# Altium PCB clusterwink_mk_ii.PcbDoc
Units mil, origin at the board's own origin, x right, y up, seen from the top; angles counter-clockwise.
Board outline 3740.16 x 1181.1 mil, 2 copper layers (Top Layer, Bottom Layer); 102 components, 79 nets, 319 pads, 145 vias.
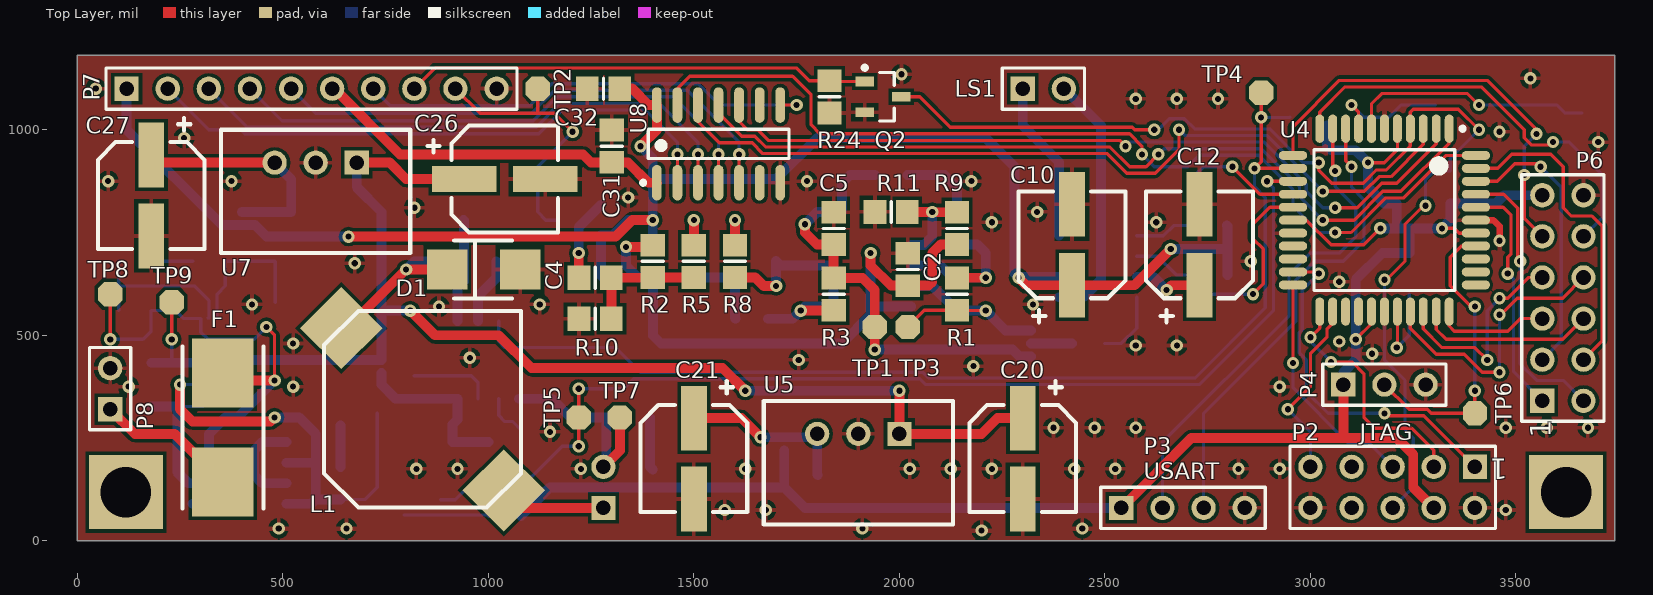
[diagram p0: Top Layer view]
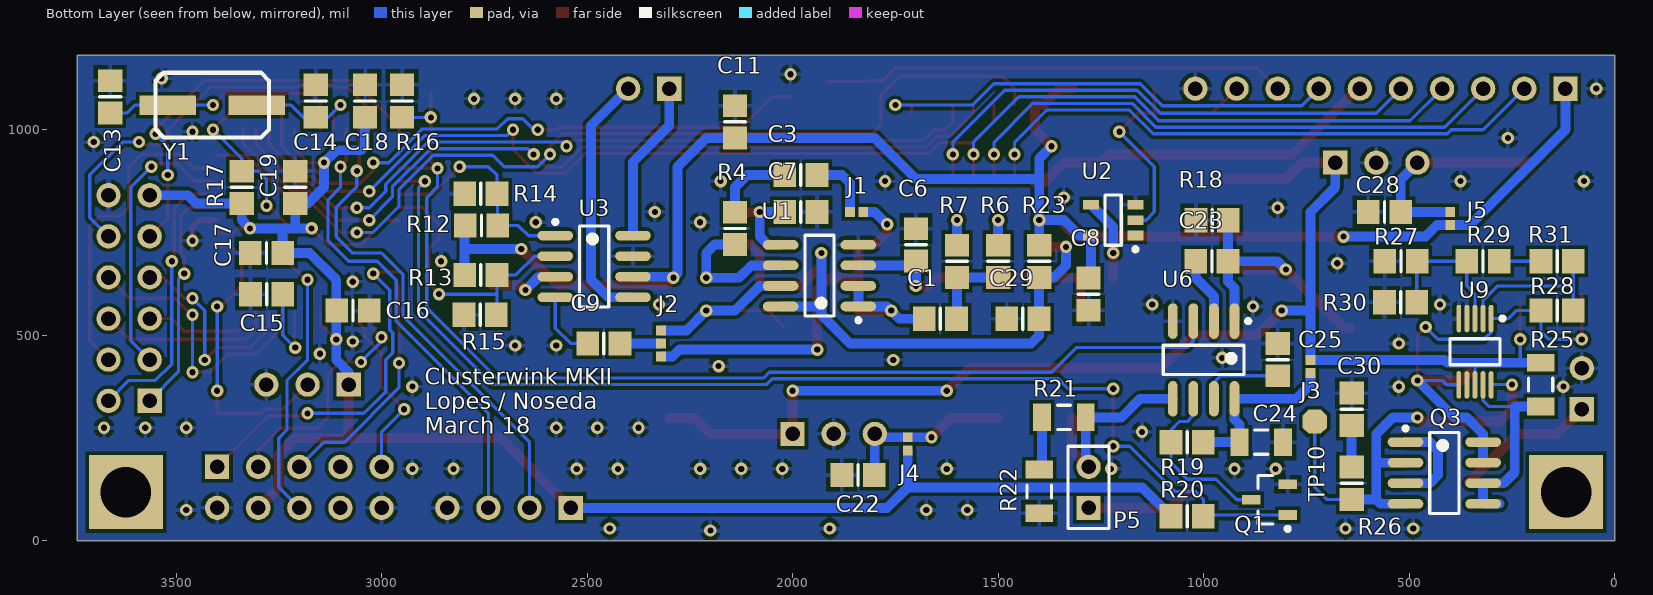
[diagram p1: Bottom Layer view, seen from below]

## Layer stack, top to bottom
Top Solder: solder mask 0.4, Solder Resist, Dk 3.5
Top Layer: signal copper 1.4
Dielectric 1: dielectric 12.6, FR-4, Dk 4.8
Bottom Layer: signal copper 1.4
Bottom Solder: solder mask 0.4, Solder Resist, Dk 3.5

## Board outline
0,0 0,1181.1 3740.16,1181.1 3740.16,0

## Design rules (kind name [scope] priority, off if disabled: settings)
Clearance "Stitching GND" [IsStitchingVia and InNet('GND') vs (IsVia and (Not IsStitchingVia)) Or IsPad] p1: gap=5 ignorepadtopadclearanceinfootprint=FALSE
Clearance [All] p2: gap=8 ignorepadtopadclearanceinfootprint=FALSE
HoleSize [All] p1: absolutevalues=TRUE maxlimit=130 minlimit=10 maxpercent=80.000 minpercent=20.000
MinimumSolderMaskSliver [All] p1: minsoldermaskwidth=4
PolygonConnect [All] p1: connectstyle=Relief reliefconductorwidth=10 reliefentries=4 polygonreliefangle="90 Angle" airgapwidth=10
RoutingCorners [All] p1: cornerstyle=45-Degree minsetback=10 maxsetback=100
RoutingVias [All] p1: holewidth=15 width=30 viastyle="Through Hole" minholewidth=15 minwidth=30 maxholewidth=30 maxwidth=60
SolderMaskExpansion [All] p1: expansion=4
UnRoutedNet [All] p1: checkbadconnections=TRUE
Width [All] p1: maxlimit=24 minlimit=8 preferedwidth=16
26 further rules are at their usual default settings.

## Classes and differential pairs
component class powersupply: C30 F1 P8 Q3 R25 R26 R27 R28 R29 R30 R31 TP8 TP9 TP10 U9
component class pi: C26 C27 C28 C29 C31 C32 J5 P7 Q2 R23 R24 U7 U8
component class led: C23 C24 C25 D1 J3 L1 P5 P6 Q1 R18 R19 R20 R21 R22 TP7 U6
component class controller: C13 C14 C15 C16 C17 C18 C19 C20 C21 C22 J4 P2 P3 P4 R16 R17 TP4 TP5 TP6 U4 U5 Y1
component class audio: C1 C2 C3 C4 C5 C6 C7 C8 C9 C10 C11 C12 J1 J2 LS1 R1 R2 R3 R4 R5 R6 R7 R8 R9 R10 R11 R12 R13 R14 R15 TP1 TP2 TP3 U1 U2 U3

## Components (designator, comment, footprint, x,y, rotation, side; value= is the part's Value field where it differs from the comment)
C1 "Cap" 6-0805_M 1640.63,540 r180 bottom value=220pF
C2 "Cap" 6-0805_M 2020,660 r270 top value=100nF
C3 "Cap" 6-0805_M 1980,890 r180 bottom value=220pF
C4 "Cap" 6-0805_M 1260,640 r180 top value=100nF
C5 "Cap" 6-0805_M 1840,760 r270 top value=220pF
C6 "Cap" 6-0805_M 1700,720 r90 bottom value=100pF
C7 "Cap" 6-0805_M 1980,800 r180 bottom value=100nF
C8 "Cap" 6-0805_M 1280,600 r270 bottom value=100nF
C9 "Cap" 6-0805_M 2459.37,480 r180 bottom value=330nF
C10 "Cap Pol2" EEEFK1H 2420,720 r180 top value=220uF
C11 "Cap" 6-0805_M 2140,1019.37 r90 bottom value=100nF
C12 "Cap Pol2" EEEFK1H 2730,720 r180 top value=220uF
C13 "Cap" 6-0805_M 3660,1080 r270 bottom value=18pF
C14 "Cap" 6-0805_M 3160,1070 r270 bottom value=18pF
C15 "Cap" 6-0805_M 3279.37,600 r180 bottom value=100nF
C16 "Cap" 6-0805_M 3069.37,560 r0 bottom value=100nF
C17 "Cap" 6-0805_M 3280,700 r180 bottom value=100nF
C18 "Cap" 6-0805_M 3040,1070 r270 bottom value=100nF
C19 "Cap" 6-0805_M 3210,860 r270 bottom value=100nF
C20 "Cap Pol2" EEEFK1H 2300,200 r0 top value=22uF
C21 "Cap Pol2" EEEFK1H 1500,200 r0 top value=22uF
C22 "Cap" 6-0805_M 1840.63,160 r180 bottom value=100nF
C23 "Cap" 6-0805_M 980,680 r180 bottom value=10nF
C24 "Cap" C1206 860,240 r0 bottom value=4.7u
C25 "Cap" 6-0805_M 820,440.63 r270 bottom value=100nF
C26 "Cap Pol2" EEEFK1H 1040,880 r90 top value=22uF
C27 "Cap Pol2" EEEFK1H 180,840 r0 top value=22uF
C28 "Cap" 6-0805_M 560,800 r180 bottom value=100nF
C29 "Cap" 6-0805_M 1440,540 r180 bottom value=100nF
C30 "Cap" 6-0805_M 640,320 r270 bottom value=10n
C31 "Cap" 6-0805_M 1300,960 r270 top value=100nF
C32 "Cap" 6-0805_M 1280,1100 r0 top value=100nF
D1 "SS24A+" DO-214AC 1077.17,660 r180 top
F1 "1.5A Fuse" OMNI_BLOK_FUSE 354.33,275.59 r90 top
J1 "Circuit Breaker" SOLDER_JUMPER_24mil 1828,800 r0 bottom
J2 "AUD Selector" SOLDER_SELECTOR_24mil 2320,448 r90 bottom
J3 "Circuit Breaker" SOLDER_JUMPER_24mil 740,440 r270 bottom
J4 "Circuit Breaker" SOLDER_JUMPER_24mil 1720,252 r270 bottom
J5 "Circuit Breaker" SOLDER_JUMPER_24mil 400,800 r270 bottom
L1 "Ind" ELLCTP 840,320 r270 top value=100uH
LS1 "Speaker" HDR1X2 2300,1100 r0 top
P2 "JTAG" HDR2X5 3400,180 r180 top
P3 "USART" HDR1X4 2540,80 r0 top
P4 "MCP9700" HDR1X3 3080,380 r0 top
P5 "PLED" HDR1X2 1280,80 r90 bottom
P6 "RGBooster" KLEMME_SEITENVERKEHRT 3614.17,590.55 r90 top
P7 "PiZero" HDR1X10 120,1100 r0 top
P8 "DC Connector" HDR1X2 80,320 r90 top
Q1 "IRLML2803" SOT-23_N 840,100 r0 bottom
Q2 "IRLML2803" SOT-23_N 1960,1080 r0 top
Q3 "FDS3992" SOIC-8 414.49,165 r180 bottom
R1 "Res2" 6-0805_M 2140,600 r270 top value=10K
R2 "Res2" 6-0805_M 1400,680 r90 top value=470k
R3 "Res2" 6-0805_M 1840,600 r90 top value=33K
R4 "Res2" 6-0805_M 2140,760 r270 bottom value=10K
R5 "Res2" 6-0805_M 1500,680 r90 top value=33k
R6 "Res2" 6-0805_M 1500,680 r270 bottom value=4k7
R7 "Res2" 6-0805_M 1600,680 r90 bottom value=33k
R8 "Res2" 6-0805_M 1600,680 r270 top value=47k
R9 "Res2" 6-0805_M 2140,760 r90 top value=10K
R10 "Res2" 6-0805_M 1260,540 r0 top value=470k
R11 "Res2" 6-0805_M 1980,800 r0 top value=10K
R12 "Res2" 6-0805_M 2757.05,766.89 r0 bottom value=10K
R13 "Res2" 6-0805_M 2758.43,646.77 r0 bottom value=10K
R14 "Res2" 6-0805_M 2758.43,844.25 r180 bottom value=10K
R15 "Res2" 6-0805_M 2760,550 r180 bottom value=10K
R16 "Res2" 6-0805_M 2950,1070 r90 bottom value=10K
R17 "Res2" 6-0805_M 3340,860 r270 bottom value=4K7
R18 "Res2" 6-0805_M 979.37,780 r180 bottom value=20K
R19 "Res2" 6-0805_M 1040,240 r0 bottom value=470K
R20 "Res2" 6-0805_M 1040,60 r0 bottom value=10K
R21 "Res2" C1206 1340,300 r180 bottom value=0.22
R22 "Res2" C1206 1400,120 r90 bottom value=0.22
R23 "Res2" 6-0805_M 1400,680 r270 bottom value=1k
R24 "Res2" 6-0805_M 1830,1080 r270 top value=10K
R25 "Res2" C1206 180,380 r90 bottom value=0R033
R26 "Res2" 6-0805_M 640,140 r270 bottom value=22k
R27 "Res2" 6-0805_M 520,680 r180 bottom value=33k
R28 "Res2" 6-0805_M 140,560 r0 bottom value=1M
R29 "Res2" 6-0805_M 320.63,680 r180 bottom value=10k
R30 "Res2" 6-0805_M 520.63,580 r180 bottom value=33k
R31 "Res2" 6-0805_M 140,680 r180 bottom value=3k3
TP1 "TestPoint" MEASUREMENT_POINT#1 1940,520 r0 top
TP2 "TestPoint" MEASUREMENT_POINT#1 1120,1100 r90 top
TP3 "TestPoint" MEASUREMENT_POINT#1 2020,520 r90 top
TP4 "TestPoint" MEASUREMENT_POINT#1 2880,1090 r180 top
TP5 "TestPoint" MEASUREMENT_POINT#1 1220,300 r0 top
TP6 "TestPoint" MEASUREMENT_POINT#2 3400,320 r0 top
TP7 "TestPoint" MEASUREMENT_POINT#1 1320,300 r90 top
TP8 "TestPoint" MEASUREMENT_POINT#1 80,600 r90 top
TP9 "TestPoint" MEASUREMENT_POINT#1 230,580 r90 top
TP10 "TestPoint" MEASUREMENT_POINT#3 730,400 r90 bottom
U1 "LM358M" M08A_N 1934.49,645 r0 bottom
U2 "74HC1G14" DBV0005A_N 1220,780 r0 bottom
U3 "TDA8551" SOIC-8 2482.83,667.4 r180 bottom
U4 "ATmega324A-AUR" 44A_N 3180,780 r270 top
U5 "TRS1" TSR1-2450 1900,260 r180 top
U6 "LM3404MAX/NOPB" M08A_N 1000,440 r270 bottom
U7 "TRS1" TSR1-2450 580,920 r180 top
U8 "TXB0104" SOIC-14 1560,965.51 r90 top
U9 "LTC4368" MSOP-10 340,460 r0 bottom
Y1 "20MHz" CRYSTAL 3411.74,1059.99 r0 bottom

## Footprints (in the part's own frame and the unit in brackets; to place one, negate y for a bottom-side part, rotate by r counter-clockwise, add the part's x,y. Pads: shape width x height; smd on the part's side, far side on the other; paste and mask are expansions set on the pad)
6-0805_M [mm] "Chip Resistor, Body 2.0x1.2mm, IPC Low Density"
  rect 1.4x1.5 smd: 1(-1,0) 2(1,0)
  silkscreen extent 0,-0.65 0,0.65, body extent -1.07,-0.7 1.07,0.7, height 0.7
44A_N [mm] "Thin QFP, 44-Leads, Body 10x10mm, Pitch 0.8mm, IPC Medium Density"
  oval 1.75x0.55 smd: 1(-5.65,4) 2(-5.65,3.2) 3(-5.65,2.4) 4(-5.65,1.6) 5(-5.65,0.8) 6(-5.65,0) 7(-5.65,-0.8) 8(-5.65,-1.6) 9(-5.65,-2.4) 10(-5.65,-3.2) 11(-5.65,-4) 23(5.65,-4) 24(5.65,-3.2) 25(5.65,-2.4) 26(5.65,-1.6) 27(5.65,-0.8) 28(5.65,0) 29(5.65,0.8) 30(5.65,1.6) 31(5.65,2.4) 32(5.65,3.2) 33(5.65,4)
  oval 0.55x1.75 smd: 12(-4,-5.65) 13(-3.2,-5.65) 14(-2.4,-5.65) 15(-1.6,-5.65) 16(-0.8,-5.65) 17(0,-5.65) 18(0.8,-5.65) 19(1.6,-5.65) 20(2.4,-5.65) 21(3.2,-5.65) 22(4,-5.65) 34(4,5.65) 35(3.2,5.65) 36(2.4,5.65) 37(1.6,5.65) 38(0.8,5.65) 39(0,5.65) 40(-0.8,5.65) 41(-1.6,5.65) 42(-2.4,5.65) 43(-3.2,5.65) 44(-4,5.65)
  silkscreen extent -5.77,-4.35 4.35,4.95, body extent -5,-5 5,5, height 1.2
C1206 [mm] "Chip Capacitor, Body 3.2x1.6mm, IPC High Density"
  rect 1.1x1.7 smd: 1(-1.35,0) 2(1.35,0)
  silkscreen extent -0.4,-0.75 0.4,0.75, body extent -1.7,-0.9 1.7,0.9, height 1.3
CRYSTAL [mm] "ABLS7M2, http://www.farnell.com/datasheets/1883657.pdf"
  rect 3.5x1.2 smd: 1(-2.75,0) 2(2.75,0)
  silkscreen extent -3.5,-2 3.5,2, body extent -3.5,-2 3.5,2, height 2
DBV0005A_N [mm] "SOT23, 5-Leads, Body 3.05x1.75mm, Pitch 0.95mm, IPC Medium Density"
  rect 1x0.6 smd: 1(-1.375,0.95) 2(-1.375,0) 3(-1.375,-0.95) 4(1.375,-0.95) 5(1.375,0.95)
  silkscreen extent -1.5,-1.55 0.5,1.92, body extent -1.42,-1.46 1.42,1.46, height 1.08
DO-214AC [mm] "Diode Package"
  rect 2.5x2.5 smd: 1(0,0) 2(4.5,0)
  silkscreen extent 0.5,-1.8 4.06,1.8, body extent 0.5,-1.25 4.05,1.25, height 2.6
EEEFK1H [mm] "Elko SMD Becher"
  rect 1.6x4 smd: 1(0,2.5) 2(0,-2.5)
  silkscreen extent -3.3,-3.3 3.3,4.79, body extent -3.15,-3.15 3.15,3.15, height 4.6
ELLCTP [mm] "Inductor"
  rect 3.6x3.6 smd rot 45: 1(-5.02,-5.02) 2(5.02,5.02)
  silkscreen extent -6.08,-6.08 6.08,6.08, body extent -6.08,-6.08 6.08,6.08, height 4.4
HDR1X2 [mm] "Connector; Header; 2 Position"
  rect 1.5x1.5 hole 0.9: 1(0,0)
  round 1.5 hole 0.9: 2(2.54,0)
  silkscreen extent -1.27,-1.27 3.81,1.27
HDR1X3 [mm] "Connector; Header; 3 Position"
  rect 1.5x1.5 hole 0.9: 1(0,0)
  round 1.5 hole 0.9: 2(2.54,0) 3(5.08,0)
  silkscreen extent -1.27,-1.27 6.35,1.27
HDR1X4 [mm] "Connector; Header; 4 Position"
  rect 1.5x1.5 hole 0.9: 1(0,0)
  round 1.5 hole 0.9: 2(2.54,0) 3(5.08,0) 4(7.62,0)
  silkscreen extent -1.27,-1.27 8.89,1.27
HDR1X10 [mm] "Connector; Header; 10 Position"
  rect 1.5x1.5 hole 0.9: 1(0,0)
  round 1.5 hole 0.9: 2(2.54,0) 3(5.08,0) 4(7.62,0) 5(10.16,0) 6(12.7,0) 7(15.24,0) 8(17.78,0) 9(20.32,0) 10(22.86,0)
  silkscreen extent -1.27,-1.27 24.13,1.27
HDR2X5 [mm] "Connector; Header; 5x2 Position"
  rect 1.5x1.5 hole 0.9: 1(0,0)
  round 1.5 hole 0.9: 2(0,2.54) 3(2.54,0) 4(2.54,2.54) 5(5.08,0) 6(5.08,2.54) 7(7.62,0) 8(7.62,2.54) 9(10.16,0) 10(10.16,2.54)
  silkscreen extent -1.27,-1.27 11.43,3.81
KLEMME_SEITENVERKEHRT [mm] "5x2 Klemme (seitenverkehrt)"
  rect 1.5x1.5 hole 0.9: 1(-6.35,1.27)
  round 1.5 hole 0.9: 2(-6.35,-1.27) 3(-3.81,1.27) 4(-3.81,-1.27) 5(-1.27,1.27) 6(-1.27,-1.27) 7(1.27,1.27) 8(1.27,-1.27) 9(3.81,1.27) 10(3.81,-1.27) 11(6.35,1.27) 12(6.35,-1.27)
  silkscreen extent -7.62,-2.54 7.62,2.54
M08A_N [mm] "SOIC, 8-Leads, Body 4.9x3.9mm, Pitch 1.27mm, IPC Medium Density"
  oval 2.2x0.6 smd: 1(-2.4,1.905) 2(-2.4,0.635) 3(-2.4,-0.635) 4(-2.4,-1.905) 5(2.4,-1.905) 6(2.4,-0.635) 7(2.4,0.635) 8(2.4,1.905)
  silkscreen extent -2.52,-2.5 0.9,2.88, body extent -2,-2.5 2,2.5, height 1.75
MEASUREMENT_POINT#1 [mm] "SMD measurement point"
  oct 1.5x1.5 smd: 1(0,0)
MEASUREMENT_POINT#2 [mm] "SMD measurement point"
  oct 1.5x1.5 smd: 1(0,-0.254)
MEASUREMENT_POINT#3 [mm] "SMD measurement point"
  oct 1.5x1.5 smd: 1(-2.794,0)
MSOP-10 [mm] "Mini Small-Outline Package 10pin"
  oval 0.3x1.7 smd: 1(-1,-2.05) 2(-0.5,-2.05) 3(0,-2.05) 4(0.5,-2.05) 5(1,-2.05) 6(1,2.05) 7(0.5,2.05) 8(0,2.05) 9(-0.5,2.05) 10(-1,2.05)
  silkscreen extent -1.82,-2.17 1.55,0.8, body extent -1.55,-1.55 1.55,1.55, height 1.09
OMNI_BLOK_FUSE [mm]
  rect 4.25x3.8 smd: 1(-3.375,0) 2(3.375,0)
  silkscreen extent -5,-2.5 5,2.5, body extent -5,-2.5 5,2.5, height 4
SOIC-8 [mm] "Small Outline Integrated Circuit 8pin Package"
  oval 2.2x0.6 smd: 1(-2.4,1.905) 2(-2.4,0.635) 3(-2.4,-0.635) 4(-2.4,-1.905) 5(2.4,-1.905) 6(2.4,-0.635) 7(2.4,0.635) 8(2.4,1.905)
  silkscreen extent -2.53,-2.5 0.9,2.88, body extent -2,-2.5 2,2.5, height 1.75
SOIC-14 [mm] "Small Outline Integrated Circuit 14pin Package"
  oval 2.2x0.6 smd: 1(-2.4,3.81) 2(-2.4,2.54) 3(-2.4,1.27) 4(-2.4,0) 5(-2.4,-1.27) 6(-2.4,-2.54) 7(-2.4,-3.81) 8(2.4,-3.81) 9(2.4,-2.54) 10(2.4,-1.27) 11(2.4,0) 12(2.4,1.27) 13(2.4,2.54) 14(2.4,3.81)
  silkscreen extent -2.52,-4.35 0.9,4.78, body extent -2,-4.37 2,4.37, height 1.75
SOLDER_JUMPER_24mil [mil] "Solder Jumber for 24mil traces, 8mil gap"
  rect 24x24 smd: 1(0,0) 2(32,0)
SOLDER_SELECTOR_24mil [mil] "Solder Selector for 24mil traces, 8mil gap"
  rect 24x24 smd: 1(0,0) 2(32,0) 3(64,0)
SOT-23_N [mm] "SOT23, 3-Leads, Body 2.9x1.3mm, Pitch 0.95mm, Lead Span 2.5mm, IPC Medium Density"
  rect 1.15x0.6 smd: 1(-1.125,0.95) 2(-1.125,-0.95) 3(1.125,0)
  silkscreen extent -1.25,-1.5 0.7,1.92, body extent -0.7,-1.5 0.7,1.5, height 1.1
TSR1-2450 [mm] "TSR1-2450 Footprint (Drop in for TO220)"
  rect 1.5x1.5 hole 0.9: 1(-2.54,0)
  round 1.5 hole 0.9: 2(0,0) 3(2.54,0)
  silkscreen extent -5.84,-2.03 5.84,5.59, body extent -5.84,-2.03 5.84,5.59, height 10.2

## Part data
C1 C2 C3 C4 C5 C6 C7 C8 C9 C11 C13 C14 C15 C16 C17 C18 C19 C22 C23 C24 C25 C28 C29 C30 C31 C32: "Capacitor", LatestRevisionDate=17-Jul-2002, LatestRevisionNote="Re-released for DXP Platform.", PackageDescription="Radial Cap, Thru-Hole; 2 Leads; 0.3 in Pin Spacing", PackageReference=RAD-0.3, Published=8-Jun-2000, Publisher="Altium Limited"
C10 C12 C20 C21 C26 C27: "Polarized Capacitor (Axial)", LatestRevisionDate=17-Jul-2002, LatestRevisionNote="Re-released for DXP Platform.", PackageDescription="Polarized Capacitor; 2 Leads", PackageReference=POLAR0.8, Published=8-Jun-2000, Publisher="Altium Limited"
D1: library part Schottky
F1: library part "Fuse 1", "Fuse", LatestRevisionDate=17-Jul-2002, LatestRevisionNote="Re-released for DXP Platform.", PackageDescription="Thru-Hole; 2 Leads", PackageReference=PIN-W2/E2.8, Published=8-Jun-2000, Publisher="Altium Limited"
J2 P4: library part "Header 3", "Header, 3-Pin", LatestRevisionDate=17-Jul-2002, LatestRevisionNote="Re-released for DXP Platform.", Publisher="Altium Limited"
L1: library part Inductor
LS1: "Loudspeaker", LatestRevisionDate=17-Jul-2002, LatestRevisionNote="Re-released for DXP Platform.", PackageReference=PIN2, Published=24-Mar-1999, Publisher="Altium Limited"
P2: library part "Header 5X2", "Header, 5-Pin, Dual row", LatestRevisionDate=17-Jul-2002, LatestRevisionNote="Re-released for DXP Platform.", Publisher="Altium Limited"
P3: library part "Header 4", "Header, 4-Pin", LatestRevisionDate=17-Jul-2002, LatestRevisionNote="Re-released for DXP Platform.", Publisher="Altium Limited"
P5 P8: library part "Header 2", "Header, 2-Pin", LatestRevisionDate=17-Jul-2002, LatestRevisionNote="Re-released for DXP Platform.", Publisher="Altium Limited"
P6: library part "Header 6X2", "Header, 6-Pin, Dual row", LatestRevisionDate=17-Jul-2002, LatestRevisionNote="Re-released for DXP Platform.", Publisher="Altium Limited"
P7: library part "Header 10", "Header, 10-Pin", LatestRevisionDate=17-Jul-2002, LatestRevisionNote="Re-released for DXP Platform.", Publisher="Altium Limited"
Q1 Q2: library part MOSFET-N, "N-Channel MOSFET", LatestRevisionDate=17-Jul-2002, LatestRevisionNote="Re-released for DXP Platform.", PackageDescription="TO, Flat Index; 3 In-Line, Axial Leads; Body Dia. 4.6mm; Lead Dia. 0.5 mm (max)", PackageReference=E3, PackageVersion=1995/1996, Published=8-Jun-2000, Publisher="Altium Limited"
Q3: "FDS3992 Dual N-Channel MOSFET"
R1 R2 R3 R4 R5 R6 R7 R8 R9 R10 R11 R12 R13 R14 R15 R16 R17 R18 R19 R20 R21 R22 R23 R24 R25 R26 R27 R28 R29 R30 R31: "Resistor", LatestRevisionDate=17-Jul-2002, LatestRevisionNote="Re-released for DXP Platform.", PackageDescription="Axial Device, Thru-Hole; 2 Leads; 0.4 in Pin Spacing", PackageReference=AXIAL-0.4, Published=8-Jun-2000, Publisher="Altium Limited"
TP1 TP2 TP3 TP4 TP5 TP6 TP7 TP8 TP9 TP10: "Testpoint"
U1: "Low Power Dual Operational Amplifier, 8-pin Narrow SOIC", Manufacturer="National Semiconductor", PackageTopMarking=NSZXTT*LM*358M, PowerWise=N, Code_IPC=SOIC127P600-8, Code_JEDEC=MS-012-AA, ComponentLink1Description="Manufacturer URL", ComponentLink1URL=http://www.national.com/, ComponentLink2Description="LM358 Datasheet", ComponentLink2URL=http://www.national.com/ds/LM/LM358.pdf, ComponentLink3Description="LM358 Web Page", ComponentLink3URL=http://www.national.com/pf/LM/LM358.html, ComponentLink4Description="M08A Package Page", ComponentLink4URL=http://www.national.com/packaging/folders/m08a.html, CompType=Amplifiers, DatasheetVersion=Oct-2005, High-Reliability=Y, PackageDescription="SOIC Narrow, 4.9 x 3.9 x 1.45mm, 8 Lead, 1.27mm Pitch", PackageReference=M08A, PackageVersion="revM, May-2009", PartNumber=LM358M, PinCount=8, RoHS=N
U2: library part SN74AHC1G14DBVT, "Single Schmitt-Trigger Inverter Gate, DBV0005A, SMALL T&R", F @ Nom Voltage(Max)(Mhz)=75, Generic Part Number=SN74AHC1G14, ICC @ Nom Voltage(Max)(mA)=0.01, Manufacturer="Texas Instruments", Operating Temperature Range(C)="-40 to 125", Rating=Catalog, Supplier Part Number 1=595-SN74AHC1G14DBVT, tpd @ Nom Voltage(Max)(ns)=16.3,10.6, Voltage(Nom)(V)=3.3,5, 3-State Output=No, Bits(#)=1, ComponentLink1Description="Manufacturer URL", ComponentLink1URL=http://www.ti.com/, ComponentLink2Description=Datasheet, ComponentLink2URL=http://www.ti.com/lit/ds/symlink/sn74ahc1g14.pdf, DatasheetVersion=SCLS321P, Input Type=CMOS, Logic=Inverting, Output Drive (IOL/IOH)(Max)(mA)=50/-50, Output Type=CMOS, PackageReference=DBV0005A, PartNumber=SN74AHC1G14DBVT, Schmitt Trigger=Yes, Sub-Family="Inverting Buffer/Driver", Supplier 1=Mouser, Supplier 2=Digi-Key, Supplier 3=Digi-Key, Supplier 4=Digi-Key, Supplier Part Number 2=296-26401-2-ND, Supplier Part Number 3=296-26401-1-ND, Supplier Part Number 4=296-26401-6-ND, Technology Family=AHC, VCC(Max)(V)=5.5, VCC(Min)(V)=2
U3: "TDA8551 1W Audio Amplifier"
U4: "8-bit AVR Microcontroller, 32KB Flash, 1KB EEPROM, 2KB SRAM, 44-pin TQFP, Industrial Grade (-40°C to 85°C), Reel", Code_JEDEC=MS-026-ACB, ComponentLink1Description="Manufacturer URL", ComponentLink1URL=http://www.atmel.com/, ComponentLink2Description="ATmega164A/164PA/324A/324PA/644A/644PA/1284/1284P Datasheet", ComponentLink2URL=http://www.atmel.com/dyn/resources/prod_documents/doc8272.pdf, ComponentLink3Description="ATmega164A/164PA/324A/324PA/644A/644PA/1284/1284P Summary", ComponentLink3URL=http://www.atmel.com/dyn/resources/prod_documents/8272S.pdf, DatasheetVersion="revC, Jun-2011", PackageDescription="44-Pin Plastic Thin Profile Quad Flat Pack, 10 x 10 x 1.0 mm Body, 0.8 mm Pitch (TQFP)", PackageReference=44A, PackageVersion="revC, Oct-2010"
U5 U7: library part TSR1-2450, "TSR1-2450 DC/DC Step-Down Converter"
U6: "1.0A Constant Current Buck Regulator for High Power LED Drivers, 8-pin Narrow SOIC, Pb-Free", Manufacturer="National Semiconductor", PackageTopMarking=NSZXTT*L3404*MA, PowerWise=Y, Code_IPC=SOIC127P600-8, Code_JEDEC=MS-012-AA, ComponentLink1Description="Manufacturer URL", ComponentLink1URL=http://www.national.com/, ComponentLink2Description="LM3404 Datasheet", ComponentLink2URL=http://www.national.com/ds/LM/LM3404.pdf, ComponentLink3Description="LM3404 Web Page", ComponentLink3URL=http://www.national.com/pf/LM/LM3404.html, ComponentLink4Description="M08A Package Page", ComponentLink4URL=http://www.national.com/packaging/folders/m08a.html, CompType=MiscPower, DatasheetVersion=Jun-2007, High-Reliability=Y, PackageDescription="SOIC Narrow, 4.9 x 3.9 x 1.45mm, 8 Lead, 1.27mm Pitch", PackageReference=M08A, PackageVersion="revM, May-2009", PartNumber=LM3404MAX/NOPB, PinCount=8, RoHS=Y
U8: "TXB0104 4bit Bidirectional Voltage-Level Translator"
U9: "LTC4368 UV/OV/Reverse Protection IC"
Y1: library part XTAL, "Crystal Oscillator", LatestRevisionDate=17-Jul-2002, LatestRevisionNote="Re-released for DXP Platform.", PackageDescription="Crystal, Thru-Hole; 2 Leads; Body 3.1 x 8.2 mm (Dia.xH)", PackageReference=R38, Published=8-Jun-2000, Publisher="Altium Limited"
J1 J3 J4 J5: LatestRevisionDate=17-Jul-2002, LatestRevisionNote="Re-released for DXP Platform.", PackageDescription="Switch; 2 Leads", PackageReference=SPST-2, Published=24-Mar-1999, Publisher="Altium Limited"

## Free pads (board coordinates)
  rect 180x180 hole 122.05: 1(3622.05,118.11) 2(118.11,118.11)

## Via types
v1: diameter 30, hole 15, Top Layer to Bottom Layer, 145 vias

## Nets (pads, with @x,y where several pads share a name; then routed paths per layer and width w, separated by ;. In a path a pad name is that pad's centre, name@x,y a point inside that pad or via, vN(x,y) a via of type N, cw(c..) or ccw(c..) an arc to the next point about the centre after c; other vN are vias at no path point)
+3V3_PI: C31.2 P7.6 U8.1 | length 884.8
  Top Layer w24: P7.6 625.25,1100 785.25,940 1230,940 1249.37,920.63 C31.2 1339.37,920.63 1388.98,871.02 U8.1
+5V: C16.2 C17.2 C18.2 C19.2 J4.2 P2.4 P3.1 P4.1 P6.11 R17.2 R20.2 U4.5 U4.17 U4.27 U4.38 | length 4548.8
  Top Layer w8: U4.17 2990,780 3050,720 3130,720 v1(3170,760) ; v1(3110,490) 3148.5,528.5 U4.27 ; v1(3140,920) 3180,920 3211.5,951.5 U4.5 ; v1(3320,760) 3350,760 3361.5,748.5 U4.38
  Top Layer w24: P3.1 2710,250 3080,250 ; P4.1 3080,250 ; P2.4 3250,130 3250,210 3210,250 3080,250
  Bottom Layer w24: R20.2 1149.37,130 1720,130 ; J4.2 1720,130 ; P3.1 1770,80 1720,130 ; C18.2@3040,1010.63 3040,960 3050,950 3110,950 v1(3140,920) 3140,860 3179.37,820.63 C19.2 3210,760 ; P4.1 3080,410 3110,440 v1(3110,490) 3110,635 3175,700 C17.2 3240.63,759.37 3240,760 ; v1(3170,760) 3210,760 ; P6.11 3470.55,840.55 3450.63,820.63 R17.2 3340,780 v1(3320,760) 3240,760 ; 3210,760 3240,760
+5V_AUD: C2.2 C29.2 R2.2 R9.1 R23.2 U1.8 | length 1488.7
  Top Layer w24: v1(1335,715) 1395.63,715 R2.2 ; v1(1930,700) 1930,670 1979.37,620.63 C2.2 2070.63,620.63 2080,630 2080,700 2100.63,720.63 R9.1
  Bottom Layer w24: v1(1335,715) 1335,670 1364.37,640.63 R23.2 1400.63,640 C29.2 1400.63,499.37 1420,480 1860,480 1930,550 1930,570 ; v1(1930,700) 1930,570 ; U1.8 1930,570
+5V_PI: C8.1 C10.1 C11.1 C32.2 J5.2 P7.1 R12.2 R13.2 R23.1 U2.5 U3.6 U8.14 | length 4224.7
  Top Layer w24: v1(660,740) 1310,740 1350,780 v1(1400,780) ; C32.2 1350,1100 1390,1060 U8.14 1410,1000 v1(1370,960) ; v1(2290,640) 2308.43,621.57 C10.1 2571.57,621.57 v1(2660,710)
  Bottom Layer w24: P7.1 120,1000 352,768 J5.2 432,768 460,740 v1(660,740) ; C8.1 1274.13,645.24 U2.5 1302.6,742.6 1340,780 v1(1400,780) ; v1(1370,960) 1400,930 1400,880 ; R23.1 v1(1400,780) ; U3.6 2292.4,642.4 v1(2290,640) 2280,650 2280,910 2210,980 C11.1 1800,980 1700,880 1400,880 ; v1(2660,710) 2797.8,710 ; R12.2 2797.8,765.51 2797.8,710 ; R13.2 2797.8,710 ; v1(1400,780) 1400,880
+24V: C20.1 C26.1 J3.1 R25.2 TP9.1 U5.1 U7.1 U9.8 | length 3308.2
  Top Layer w8: v1(230,490) TP9.1
  Top Layer w24: U7.1 760,920 800,880 C26.1 ; v1(810,560) 870,500 1025,500 1105,420 1570,420 v1(1625,365) ; v1(2000,365) U5.1 2200,260 2238.43,298.43 C20.1
  Bottom Layer w8: 230,433.15 v1(230,490) ; U9.8 340,433.15
  Bottom Layer w24: R25.2 230,433.15 340,433.15 407.09,433.15 413.94,440 J3.1 740,560 ; U7.1 680,860 740,800 740,560 ; v1(810,560) 740,560 ; v1(1625,365) v1(2000,365)
AUD_INT: J2.3 R1.2 TP3.1 U1.7 | length 542.8
  Top Layer w8: TP3.1 2060.63,560.63 R1.2 2140.63,560 v1(2210,560)
  Bottom Layer w24: U1.7 2080,620 2140,560 v1(2210,560) 2258,512 J2.3
AUD_PWM: P7.9 TP2.1 U2.2 | length 672.9
  Top Layer w8: P7.9 980,1040 1120,1040 ; TP2.1 1120,1040 ; v1(1205,995) 1160,1040 1120,1040
  Bottom Layer w8: U2.2 1140,780 1120,800 1120,910 v1(1205,995)
AUD_RC: C5.2 J1.1 J2.1 R3.2 TP1.1 | length 898.1
  Top Layer w24: v1(1770,770) 1770,750 1799.37,720.63 C5.2 R3.2 1910.63,639.37 1940,610 TP1.1 v1(1940,465)
  Bottom Layer w24: v1(1770,770) 1800,800 J1.1 ; v1(1940,465) 2275,465 2292,448 J2.1
B\/D: P6.10 U4.11 | length 1027.6
  Top Layer w8: U4.11 3022.52,1042.52 3084,1104 3416,1104 3520,1000 3520,980 3537,963 3583,963 v1(3590,970)
  Bottom Layer w8: v1(3590,970) 3630,970 3710,890 3710,786.38 P6.10
DATA0: P6.1 U4.40 | length 575.7
  Top Layer w8: U4.40@3410,811.5 3468.5,811.5 3488,792 3488,698 3480,690 v1(3480,650)
  Bottom Layer w8: v1(3480,650) 3494,636 3494,410.72 P6.1
DATA1: P6.2 U4.41 | length 688.1
  Top Layer w8: U4.41 3469.64,842.99 3504,808.63 3504,686 v1(3510,680)
  Bottom Layer w8: v1(3510,680) 3510,430 3550,390 3614.72,390 P6.2
DATA2: P6.3 U4.42 | length 687.2
  Top Layer w8: U4.42 3454.49,874.49 3497,917 3553,917 v1(3560,910)
  Bottom Layer w8: v1(3560,910) 3610,860 3610,486.38 P6.3
DATA3: P6.4 U4.43 | length 796.1
  Top Layer w8: U4.43 3455.98,905.98 3490,940 3585,940 3615,910 3615,810 3635,790 3685,790 3710,765 3710,486.38 P6.4
DATA4: P6.5 U4.33 | length 279.6
  Top Layer w8: U4.33 3337.48,522.52 3350,510 3480,510 3510.55,540.55 P6.5
DATA5: P6.6 U4.32 | length 432.6
  Top Layer w8: U4.32 3305.98,514.02 3330,490 3613.62,490 P6.6
DATA6: P6.7 U4.31 | length 516.4
  Top Layer w8: U4.31 3274.49,515.51 3320,470 3400,470 v1(3430,440) ; v1(3460,590) 3480,590 3530.55,640.55 P6.7
  Bottom Layer w8: v1(3430,440) 3430,560 v1(3460,590)
DATA7: P6.8 U4.30 | length 683.6
  Top Layer w8: U4.30 3242.99,517.01 3306,454 3374.18,454 3418.18,410 v1(3460,410) ; v1(3460,550) 3462.63,550 3502.63,590 3613.62,590 P6.8
  Bottom Layer w8: v1(3460,410) v1(3460,550)
DRIVER: Q1.1 R20.1 TP5.1 U4.14 | length 2823.9
  Top Layer w8: v1(1220,230) TP5.1 v1(1220,370) ; v1(2894.49,874.49) U4.14
  Bottom Layer w8: Q1.1 998.03,62.6 R20.1 1000.63,100.63 1020,120 1070,120 1180,230 v1(1220,230) ; v1(1220,370) 1330,370 1354,394 2050,394 2064,380 2730,380 2910,560 2910,858.98 v1(2894.49,874.49)
GND: C2.1 C5.1 C6.2 C7.2 C8.2 C10.2 C11.2 C12.2 C13.1 C14.1 C15.1 C16.1 C17.1 C18.1 C19.1 C20.2 C21.2 C22.1 C24.1 C25.1 C26.2 C27.2 C28.1 C29.1 C30.1 C31.1 C32.1 D1.1 P2.2 P2.10 P3.4 P4.3 P6.12 P7.10 P8.2 Q1.2 Q2.2 R10.1 R11.1 R14.1 R15.1 R16.2 R18.1 R22.1 R24.2 R27.1 R30.1 U1.4 U2.3 U3.7 U4.6 U4.18 U4.28 U4.39 U5.2 U6.4 U7.2 U8.7 U9.4 U9.5 | length 98.8
  Top Layer w16: U4.39 3445,780 3460,765 v1(3460,730)
  other v1: 2200,25 490,30 655,30 1910,30 2445,30 1575,75 1675,75 3475,75 825,175 925,175 1225,175 1625,175 2025,175 2125,175 2225,175 2425,175 2525,175 2825,175 2925,175 1150,265 2375,275 2475,275 2575,275 3475,275 3575,275 3675,275 125,375 525,375 2925,375 2180,425 1755,440 955,445 3150,455 2575,475 2675,475 525,480 3070,485 880,570 425,575 1125,575 2325,575 3070,630 675,675 2855,680 2225,775 2625,775 2335,800 820,810 1340,835 75,875 375,875 1775,875 2175,875 3700,970 260,980 3460,995 2575,1075 2675,1075 2775,1075 45,1100 3535,1125 2005,1135
MISO: U4.2 U8.10 | length 1942.5
  Top Layer w8: U8.10 1610,1020 1630,1000 1655,1000 1681,974 2536,974 v1(2550,960) ; v1(3060,810) 3113.44,810 3173.44,870 3210,870 3305.98,965.98 U4.2
  Bottom Layer w8: v1(2550,960) 2560,970 2887.37,970 2990,867.37 2990,850 3030,810 v1(3060,810)
MISO_PI: P7.5 U8.5 | length 1289.2
  Top Layer w8: U8.5 v1(1610,940)
  Bottom Layer w8: P7.5 580,1040 1105,1040 1161,1096 1484,1096 1610,970 v1(1610,940)
MODE: R13.1 R15.2 U3.2 U4.16 | length 704.5
  Top Layer w8: v1(2860,600) 2885,625 2885,710 2860,735 2860,770 2901.5,811.5 U4.16
  Bottom Layer w8: U3.2 2627.6,692.4 2673.23,646.77 R13.1 2719.06,600 ; R15.2 2719.06,551.57 2719.06,600 ; v1(2860,600) 2719.06,600
MOSI: U4.1 U8.11 | length 2068.7
  Top Layer w8: U8.11 1560,1040 1616,984 1648.37,984 1674.37,958 2512,958 2560,910 2600,910 v1(2630,940) ; v1(3030,780) 3106.07,780 3176.07,850 3220,850 3337.48,967.48 U4.1
  Bottom Layer w8: v1(2630,940) 2644,954 2880.75,954 2973.37,861.37 2973.37,836.63 v1(3030,780)
MOSI_PI: P7.4 U8.4 | length 1340.9
  Top Layer w8: U8.4 v1(1560,940)
  Bottom Layer w8: P7.4 498,1022 1109.63,1022 1167.63,1080 1450,1080 1560,970 v1(1560,940)
NetC1_1: C1.1 R3.1 U1.1 U1.2 | length 302.7
  Top Layer w24: v1(1760,560) 1760.63,560.63 R3.1
  Bottom Layer w24: C1.1 1740,540 v1(1760,560) 1770,570 U1.1 U1.2
NetC1_2: C1.2 R6.2 R7.1 | length 201.2
  Bottom Layer w24: R6.2 R7.1 1600,541.26 C1.2
NetC3_1: C3.1 R4.1 | length 193.7
  Bottom Layer w24: C3.1 2110,890 2140,860 R4.1
NetC3_2: C3.2 J1.2 | length 158.9
  Bottom Layer w24: J1.2 1860,870 1880,890 C3.2
NetC4_1: C4.1 R2.1 R5.1 R10.2 | length 300.9
  Top Layer w24: R10.2 C4.1 1399.37,640 R2.1 R5.1
NetC4_2: C4.2 U2.4 | length 200.1
  Top Layer w24: v1(1220,700) 1220,640.63 C4.2
  Bottom Layer w24: v1(1220,700) 1220,763.27 U2.4
NetC6_1: C6.1 R8.2 U1.3 | length 313.6
  Top Layer w24: R8.2 1649.37,640.63 1670,620 v1(1700,620)
  Bottom Layer w24: v1(1700,620) C6.1 1710.63,670 U1.3
NetC7_1: C7.1 R9.2 R11.2 U1.5 | length 300.8
  Top Layer w24: R11.2 v1(2080,800) 2080.63,799.37 R9.2
  Bottom Layer w24: C7.1 v1(2080,800) 2080,740 2060,720 U1.5
NetC9_1: C9.1 U3.4 | length 169.1
  Bottom Layer w8: C9.1 2540,480 2577.32,517.32 U3.4
NetC9_2: C9.2 J2.2 | length 100
  Bottom Layer w24: J2.2 C9.2
NetC12_1: C12.1 U3.3 | length 170.9
  Top Layer w24: v1(2650,610) 2661.57,621.57 C12.1
  Bottom Layer w24: U3.3 2617.6,642.4 v1(2650,610)
NetC13_2: C13.2 U4.7 Y1.2 | length 602.3
  Top Layer w8: U4.7 3148.5,1063.5 3173,1088 3382,1088 v1(3410,1060)
  Bottom Layer w8: v1(3410,1060) Y1.2 3600,1060 3619.37,1040.63 C13.2
NetC14_2: C14.2 U4.8 Y1.1 | length 292.4
  Top Layer w8: v1(3100,1060) 3117.01,1042.99 U4.8
  Bottom Layer w8: v1(3100,1060) 3129.37,1030.63 C14.2 3190.63,1030.63 3219.99,1059.99 Y1.1
NetC15_2: C15.2 U4.29 | length 230.6
  Top Layer w8: v1(3210,470) 3211.5,471.5 U4.29
  Bottom Layer w8: v1(3210,470) 3240,500 C15.2
NetC21_1: C21.1 C22.2 J4.1 U5.3 | length 423.1
  Top Layer w24: C21.1 1615.57,298.43 v1(1662,252)
  Bottom Layer w24: v1(1662,252) J4.1 1792,252 U5.3 1800,161.26 C22.2
NetC23_1: C23.1 U6.2 | length 163.9
  Bottom Layer w24: U6.2 975,595 1019.37,639.37 C23.1
NetC23_2: C23.2 D1.2 L1.1 R18.2 U6.1 | length 717.8
  Top Layer w24: L1.1 657.66,517.66 v1(800,660) D1.2
  Bottom Layer w24: v1(800,660) 820,680 C23.2 ; U6.1 925,615 940.63,630.63 C23.2 ; R18.2 940.63,779.37 C23.2
NetC24_2: C24.2 J3.2 R19.1 U6.8 | length 425.2
  Bottom Layer w24: J3.2 740,380 774.49,345.51 U6.8 925,295 913.15,283.15 C24.2 R19.1
NetC25_2: C25.2 U6.7 | length 201.2
  Bottom Layer w8: C25.2 958.74,401.26 975,385 U6.7
NetC27_1: C27.1 C28.2 J5.1 U7.3 | length 565.1
  Top Layer w24: C27.1 198.43,920 U7.3
  Bottom Layer w24: J5.1 C28.2 520.63,879.37 U7.3
NetC30_2: C30.2 R26.1 | length 101.3
  Bottom Layer w24: R26.1 C30.2
NetF1_1: F1.1 P8.1 | length 347.8
  Top Layer w24: P8.1 140,260 237.05,260 F1.1
NetF1_2: F1.2 Q3.7 Q3.8 R28.2 TP8.1 U9.1 U9.6 | length 1271
  Top Layer w8: v1(80,490) TP8.1 ; v1(460,520) 480,500 v1(480,390)
  Top Layer w24: F1.2 372.8,390 v1(480,390)
  Bottom Layer w8: v1(80,490) 160,490 179.37,509.37 R28.2 240,560 259.29,540.71 U9.1 300.63,507.51 318.14,490 430,490 v1(460,520) ; U9.6@380.08,380 U9.6 409.29,379.29 420,390 v1(480,390)
  Bottom Layer w24: Q3.7 Q3.8 320,260 360,300 390,300 v1(480,390)
NetL1_2: L1.2 P5.1 | length 259.9
  Top Layer w24: L1.2 1080,80 P5.1
NetLS1_1: LS1.1 U3.8 | length 394.2
  Bottom Layer w24: LS1.1 2300,1010 2388.35,921.65 U3.8
NetLS1_2: LS1.2 U3.5 | length 621.6
  Bottom Layer w24: U3.5 2447.4,592.4 2490,635 2490,1010 LS1.2
NetP5_2: P5.2 R21.2 TP7.1 U6.5 | length 490.1
  Top Layer w24: P5.2 1320,220 TP7.1
  Bottom Layer w24: U6.5 1154.49,345.51 1200,300 R21.2 1286.85,186.85 P5.2
NetP7_8: P7.8 Q2.1 R24.1 | length 1129.9
  Top Layer w8: P7.8 870,1150 1750,1150 1780.63,1119.37 1820,1119.37 1821.97,1117.4 Q2.1
NetQ1_1: Q1.3 R19.2 U6.6 | length 422.5
  Bottom Layer w8: Q1.3 920,100 970,150 1040,150 1079.37,189.37 R19.2 1079.37,270.63 1060,290 1040,290 1025,305 U6.6
NetQ3_1: Q3.1 Q3.3 | length 234.5
  Bottom Layer w24: Q3.3 450,140 430,160 430,220 450,240 Q3.1
NetQ3_2: Q3.2 Q3.4 R26.2 TP10.1 U9.10 | length 1122.7
  Top Layer w24: v1(250,380) 250,320 280,290 470,290 v1(480,300)
  Bottom Layer w8: v1(250,380) 299.92,380 U9.10 ; R26.2 700.63,100.63 730,130 TP10.1 TP10.1@730,310
  Bottom Layer w24: v1(480,300) 540,300 580,260 580,190 ; Q3.4 570,90 580,100 ; Q3.2 580,190 ; R26.2 639.37,100 580,100 ; 580,100 580,190
NetQ3_5: Q3.5 Q3.6 R25.1 U9.9 | length 522.8
  Bottom Layer w8: 243.15,326.85 306.85,326.85 320.31,340.31 U9.9
  Bottom Layer w24: R25.1 243.15,326.85 243.15,166.85 270,140 Q3.6 Q3.5 Q3.5@280,90
NetR1_1: R1.1 R4.2 U1.6 | length 402.3
  Top Layer w24: R1.1 2140.63,640 v1(2210,640)
  Bottom Layer w24: U1.6 2100,670 2130,640 v1(2210,640) 2210,700 2189.37,720.63 R4.2
NetR5_2: R5.2 R6.1 | length 121.3
  Top Layer w24: R5.2 v1(1500,780)
  Bottom Layer w24: R6.1 v1(1500,780)
NetR7_2: R7.2 R8.1 | length 121.3
  Top Layer w24: R8.1 v1(1600,780)
  Bottom Layer w24: R7.2 v1(1600,780)
NetR21_1: R21.1 R22.2 | length 129.7
  Bottom Layer w24: R21.1 1393.15,180 R22.2
NetR27_2: R27.2 R29.1 R30.2 U9.3 | length 368.5
  Bottom Layer w8: U9.3 340,600 360,620 R29.1 R27.2 481.26,679.37 R30.2
NetR28_1: R28.1 R31.2 U9.2 | length 400.8
  Bottom Layer w8: R28.1 100.63,620 ; R31.2 100.63,620 ; U9.2@318.54,542.49 U9.2 320.31,584.69 285,620 100.63,620
NetR29_2: R29.2 R31.1 | length 101.9
  Bottom Layer w8: R31.1 R29.2
OE_PI: P7.7 U8.8 | length 1150.9
  Top Layer w8: U8.8@1710,1040 U8.8 v1(1750,1060)
  Bottom Layer w8: P7.7 761.53,1058.47 1100.84,1058.47 1154.37,1112 1510.63,1112 1562.63,1060 v1(1750,1060)
PWM: R16.1 TP4.1 U4.13 U6.3 | length 2726.6
  Top Layer w8: TP4.1 v1(2880,1030) 2880,921.97 v1(2864.02,905.98) U4.13
  Bottom Layer w8: U6.3 1025,485 1040,470 1310,470 1370,410 2056.63,410 2070.63,396 2719.43,396 2890,566.57 2890,835 2864.02,860.98 v1(2864.02,905.98) ; v1(2880,1030) 2949.37,1030 R16.1
RST: P2.6 Q2.3 R17.1 U4.4 | length 2773.6
  Top Layer w8: Q2.3 2050,1080 2124,1006 2566.63,1006 2572.63,1000 v1(2620,1000) ; v1(3020,920) 3020,901.82 3051.82,870 3128.18,870 3160.18,902 3184.63,902 3242.99,960.36 U4.4 3242.99,1042.99 3250,1050 3360,1050 v1(3410,1000) v1@3400,1000 ; v1(3180,635) 3185,635 3230,680 3230,770 3275,815 v1(3280,815)
  Bottom Layer w8: v1(2620,1000) 2630,1000 2657,1027 2693,1027 2718,1002 2900.63,1002 2982.63,920 v1(3020,920) ; v1(3180,635) 3180,440 3230,390 3230,270 3250,250 3250,130 P2.6 ; v1(3280,815) 3280,879.37 3300,899.37 R17.1 3340,930 v1(3410,1000)
RX: P3.3 U4.9 | length 1143.4
  Top Layer w8: U4.9 3085.51,924.49 v1(3100,910)
  Bottom Layer w8: P3.3 2740,310 2964,534 2964,634 3010,680 3080,680 3130,730 3130,830 3100,860 v1(3100,910)
S\S\: U4.44 U8.13 | length 2331.5
  Top Layer w8: U8.13 1460,1100 1490,1130 1740,1130 1785,1085 1785,1011.57 1806.57,990 2560,990 2590,960 v1(2590,940) ; v1(3060,750) 3098.69,750 3182.69,834 3226.63,834 3330.11,937.48 U4.44
  Bottom Layer w8: v1(2590,940) 2620,910 2702,910 2730,938 2874.12,938 2957.37,854.75 2957.37,814.44 3021.82,750 v1(3060,750)
S\S\_PI: P7.2 U8.2 | length 1440.9
  Top Layer w8: U8.2 v1(1460,940)
  Bottom Layer w8: P7.2 320,1000 397.37,1000 407.37,990 1122.88,990 1180.88,1048 1382,1048 1460,970 v1(1460,940)
SCK: U4.3 U8.12 | length 2076.3
  Top Layer w8: U8.12 1510,1020 1562,968 1641.75,968 1667.75,942 2505.37,942 2553.37,894 2622.18,894 2680,951.82 v1(2680,1000) ; v1(3030,850) 3130.81,850 3166.81,886 3196,886 3274.49,964.49 U4.3
  Bottom Layer w8: v1(2680,1000) 2694,986 2894,986 v1(3030,850)
SCK_PI: P7.3 U8.3 | length 1390.9
  Top Layer w8: U8.3 v1(1510,940)
  Bottom Layer w8: P7.3 414,1006 1116.25,1006 1174.25,1064 1416,1064 1510,970 v1(1510,940)
SEND: P6.9 U4.12 | length 1049
  Top Layer w8: U4.12 2957.56,1007.56 3070,1120 3430,1120 3550,1000 v1(3550,990) ; v1(3520,890) 3520,784.72 P6.9
  Bottom Layer w8: v1(3520,890) 3520,960 v1(3550,990)
TCK: P2.1 U4.21 | length 863.6
  Top Layer w8: U4.21 3015.98,654.02 v1(3020,650) ; v1(3180,310) 3186,304 3276,304 P2.1
  Bottom Layer w8: v1(3020,650) 2980,610 2980,513.18 2973,506.18 2973,457 2990,440 2990,362.63 3042.63,310 v1(3180,310)
TDI: P2.9 U4.24 | length 445.5
  Top Layer w8: v1(2945,320) 3000,375 3000,455 3040,495 3040,515 3054.02,529.02 U4.24
  Bottom Layer w8: v1(2945,320) 3000,265 P2.9
TDO: P2.3 U4.23 | length 593.8
  Top Layer w8: v1(3000,495) 3022.52,517.52 U4.23 ; v1(3050,435) 3101.03,435 3130,406.03 3130,300 3156,274 3246,274 3300,220 P2.3
  Bottom Layer w8: v1(3000,495) 3000,485 v1(3050,435)
TEMP: P4.2 TP6.1 U4.37 | length 723.3
  Top Layer w8: P4.2 3240,320 3283.84,320 3293.84,310 TP6.1 ; TP6.1@3400,320 v1(3400,365) ; v1(3400,570) 3390,570 3340,620 3340,690 3367.01,717.01 U4.37
  Bottom Layer w8: v1(3400,365) v1(3400,570)
TMS: P2.5 U4.22 | length 572.2
  Top Layer w8: v1(2957.56,432.44) U4.22
  Bottom Layer w8: v1(2957.56,432.44) 2957.56,372.44 3090,240 3140,240 P2.5
TX: P3.2 U4.10 | length 1181.3
  Top Layer w8: U4.10 3054.02,905.98 v1(3060,900)
  Bottom Layer w8: P3.2 2640,240 2948,548 2948,648 3000,700 3070,700 3110,740 3110,811.82 3060,861.82 v1(3060,900)
U/D: R12.1 R14.2 U3.1 U4.15 | length 548.2
  Top Layer w8: v1(2810,910) 2877.01,842.99 U4.15
  Bottom Layer w8: U3.1 2642.4,742.4 2666.89,766.89 R12.1 2717.68,842.88 R14.2 2719.05,889.06 2740,910 v1(2810,910)
pads on no net: P2.7 P2.8 U2.1 U4.19 U4.20 U4.25 U4.26 U4.34 U4.35 U4.36 U8.6 U8.9 U9.7

## Polygon pours and split planes (outlines as drawn)
GND on Bottom Layer "Bottom Layer-GND" (solid, pour order 0): 0,0 3740.16,0 3740.16,1181.1 0,1181.1
GND on Top Layer "Top Layer-GND" (solid, pour order 2): 0,0 3740.16,0 3740.16,1181.1 0,1181.1

## Silkscreen, mask and mechanical layers (free items; w line width, h text height)
Bottom Overlay:
  text "Clusterwink MKII" at 2895,380 h40
  text "Lopes / Noseda" at 2895,320 h40
  text "March 18" at 2895,260 h40
Mechanical 1:
  the board outline again, w10

## Dimensions
0,0 to 0,1181.1 on Mechanical 13
0,0 to 3740.16,0 on Mechanical 13

## Text inside footprints (layer, text, board x,y; h text height)
P2: Top Overlay "1" at 3480,200 h50 r180
P6: Top Overlay "1" at 3584.17,250.55 h50 r90